# Altium PCB MotorBoard.PcbDoc
Units mil, origin at the board's own origin, x right, y up, seen from the top; angles counter-clockwise.
Board outline 1600 x 1600 mil, 2 copper layers (Top Layer, Bottom Layer), stack 61.811 mil thick; 13 components, 19 nets, 60 pads, 3 vias.
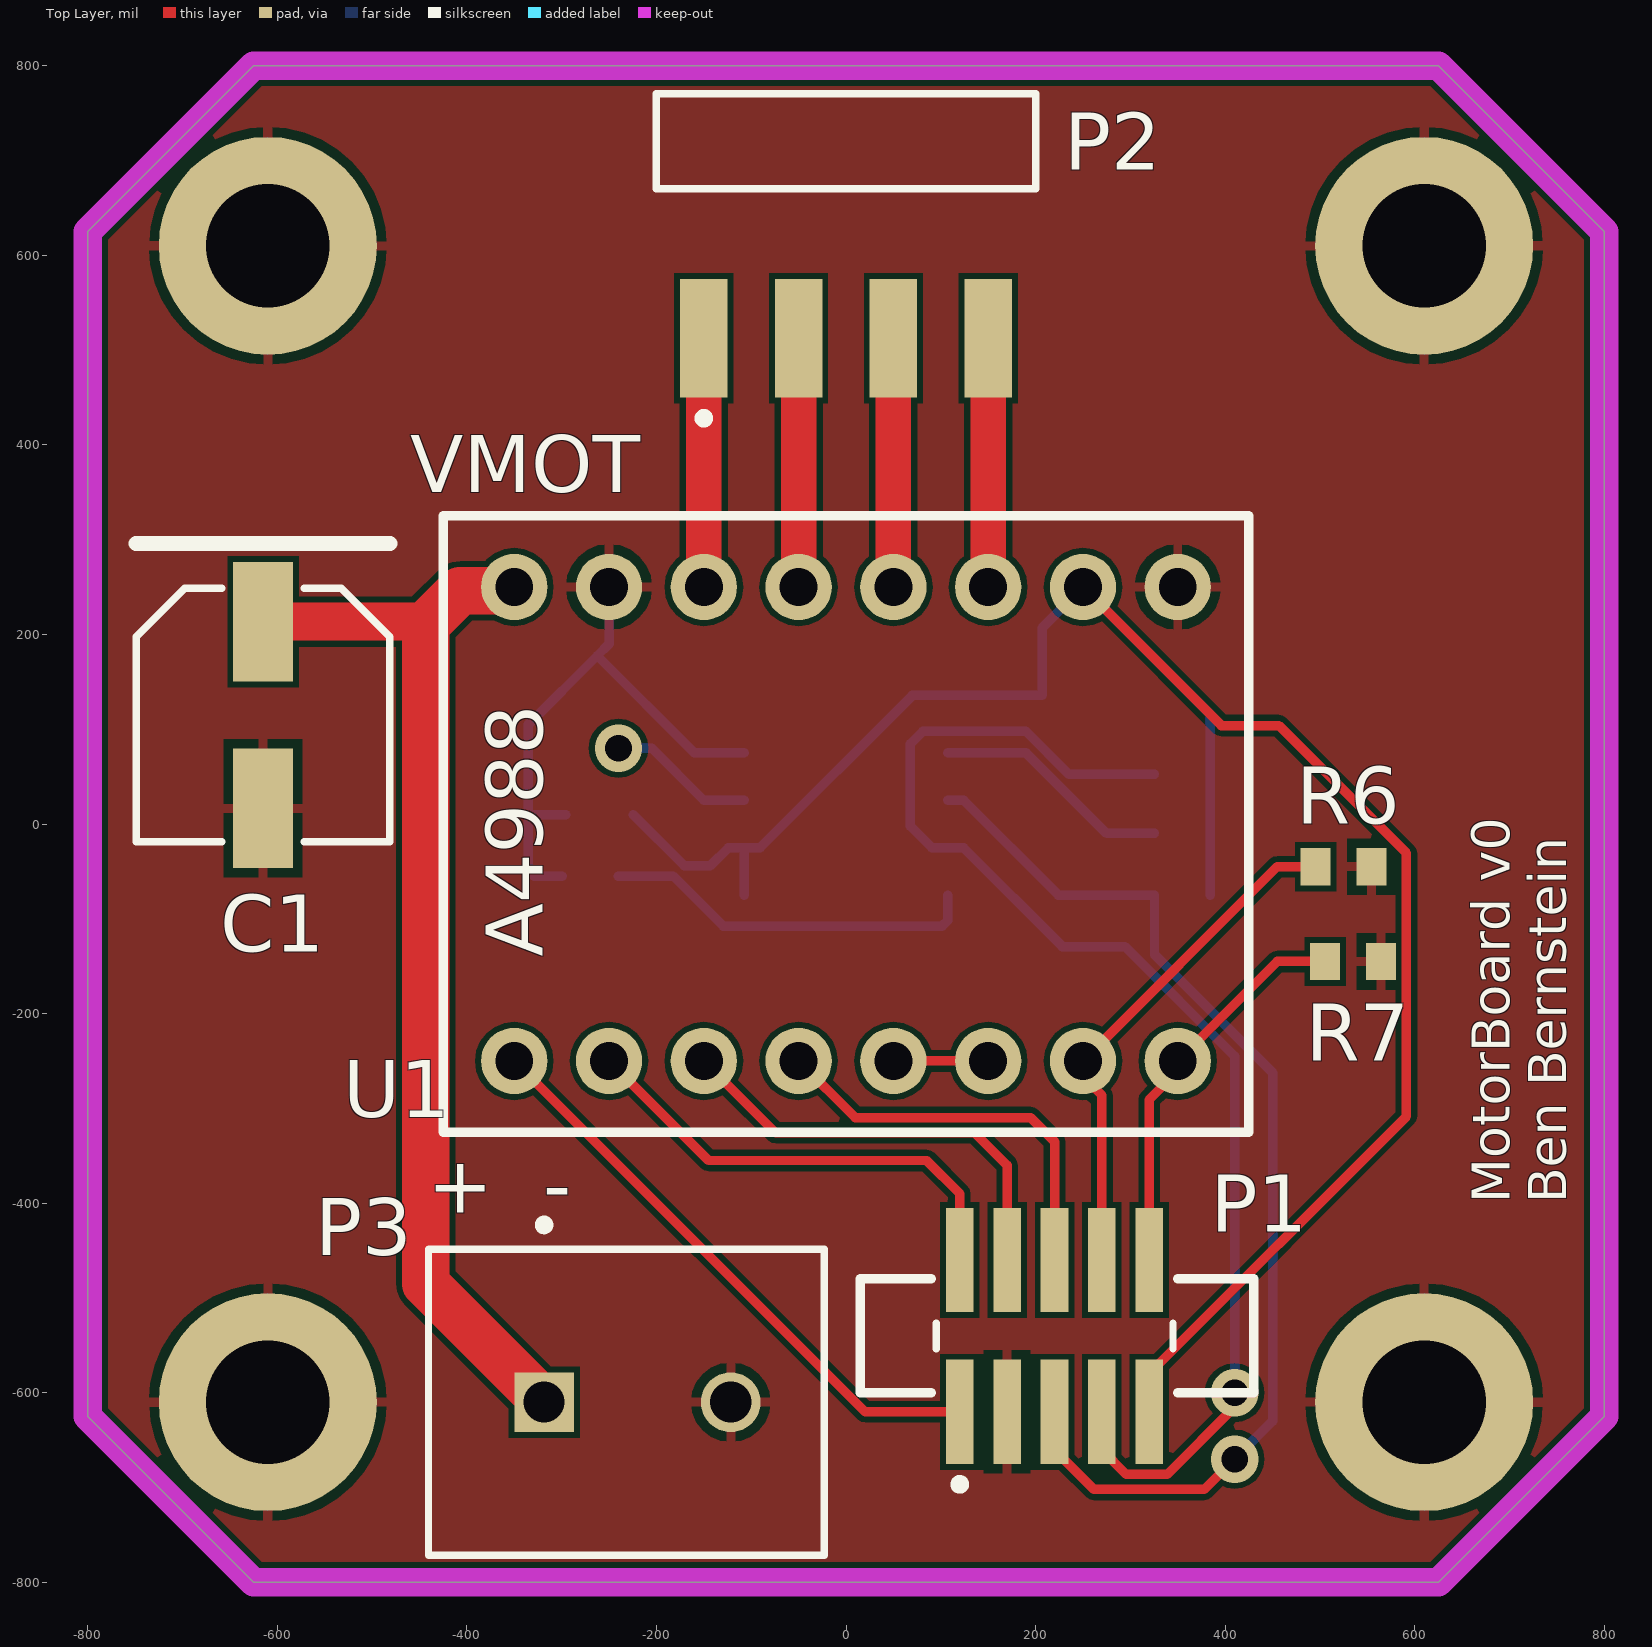
[diagram p0: Top Layer view]
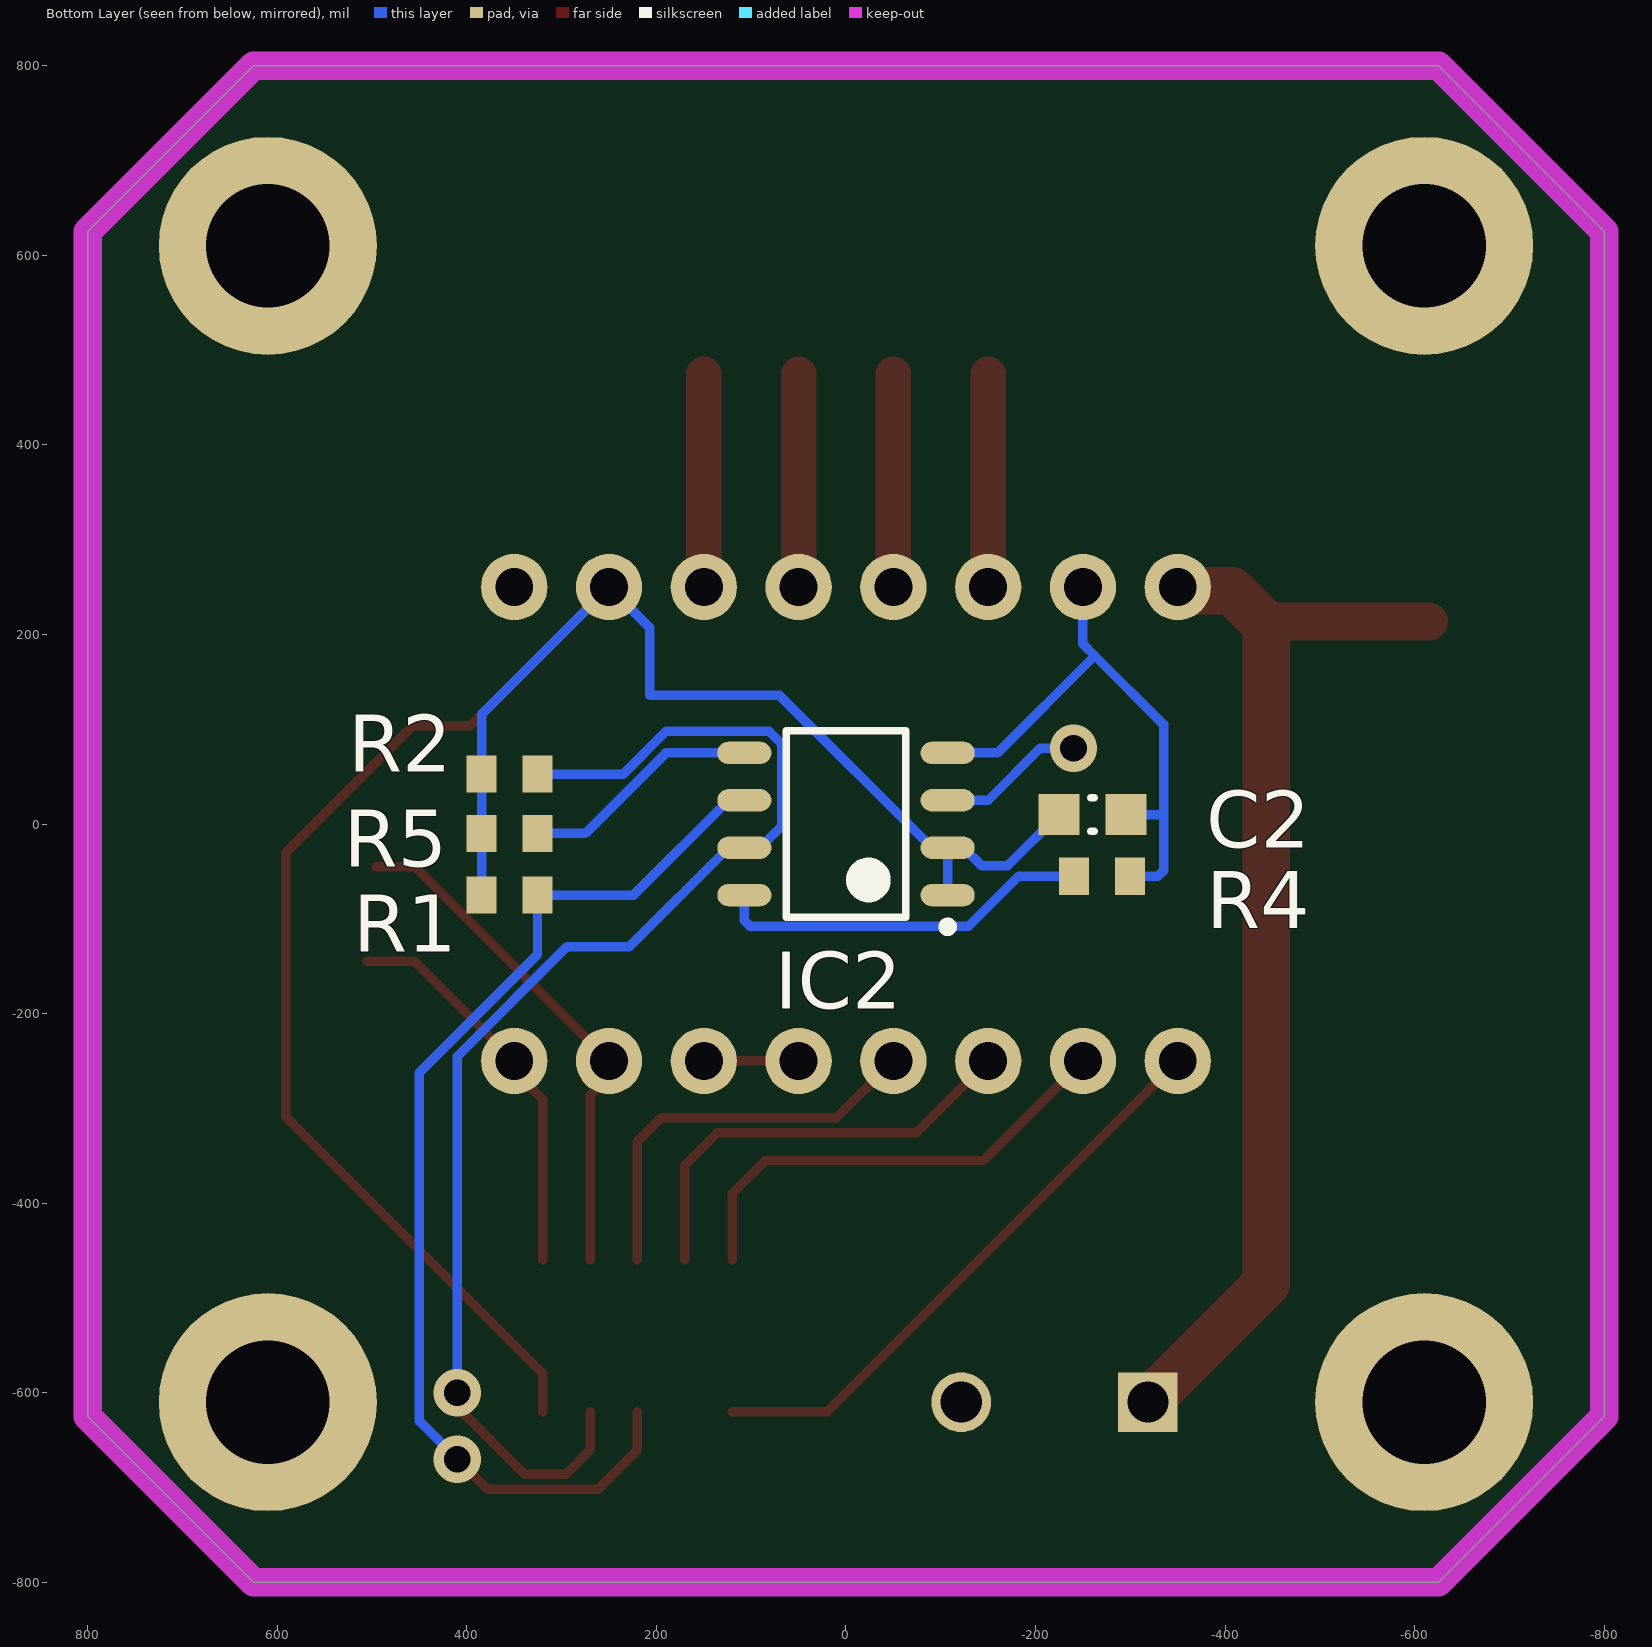
[diagram p1: Bottom Layer view, seen from below]

## Layer stack, top to bottom
Top Solder: solder mask 0.3937, Solder Resist, Dk 3.5
Top Layer: signal copper 1.378
Dielectric 1: dielectric 59.0551, FR-4, Dk 4.8
Bottom Layer: signal copper 1.378
Bottom Solder: solder mask 0.3937, Solder Resist, Dk 3.5

## Board outline
-800,-625 -800,625 -625,800 625,800 800,625 800,-625 625,-800 -625,-800

## Design rules (kind name [scope] priority, off if disabled: settings)
AcuteAngle [All] p1: minimum=6.00000000000000E+0001 checktracksonly=FALSE
AssemblyTestPointUsage [All] p1: allowmultiple=TRUE
AssemblyTestpoint [All] p1: testpointundercomponent=TRUE minsize=30 maxsize=100 preferedsize=60 minholesize=0 maxholesize=40 preferedholesize=32 testpointgrid=1 usegrid=FALSE gridtolerance=0.01 allowsidebottom=TRUE
BoardOutlineClearance [All] p1: gap=10 ignorepadtopadclearanceinfootprint=FALSE except(100: SMDPad-OutlineEdge SMDPad-CavityEdge SMDPad-CutoutEdge THPad-OutlineEdge THPad-CavityEdge THPad-CutoutEdge)
Clearance [All] p1: gap=6 ignorepadtopadclearanceinfootprint=FALSE except(120: SMDPad-THPad)
FabricationTestPointUsage [All] p1: valid=0 allowmultiple=TRUE
FabricationTestpoint [All] p1: side=2 testpointundercomponent=TRUE minsize=30 maxsize=100 preferedsize=60 minholesize=0 maxholesize=40 preferedholesize=32 testpointgrid=1 allowsidebottom=TRUE usegrid=FALSE gridtolerance=0.01
HoleSize [All] p1: absolutevalues=TRUE maxlimit=100 minlimit=8 maxpercent=80.000 minpercent=20.000
MinimumAnnularRing [All] p1: minimumring=6
MinimumSolderMaskSliver [All] p1: minsoldermaskwidth=4
PlaneClearance [All] p1: clearance=10
PolygonConnect [All] p1: connectstyle=Relief reliefconductorwidth=10 reliefentries=4 polygonreliefangle="90 Angle" airgapwidth=10
RoutingVias [All] p1: holewidth=16 width=30 viastyle="Through Hole" minholewidth=8 minwidth=20 maxholewidth=30 maxwidth=50
SMDEntry [All] p1: side=TRUE corner=TRUE anyangle=FALSE
SMDNeckDown [All] p1: percent=75.000
SMDToCorner [All] p1: distance=0
SMDToPlane [All] p1: distance=0
SilkToSilkClearance [All] p1: silktosilkclearance=0
SilkToSolderMaskClearance [IsPad] p1: minsilkscreentomaskgap=0 clearancetoexposedcopper=TRUE
SolderMaskExpansion [All] p1: expansion=4 istentingtop=FALSE
UnRoutedNet [All] p1: checkbadconnections=TRUE
Width [All] p1: maxlimit=1000 minlimit=6 preferedwidth=10
20 further rules are at their usual default settings.

## Components (designator, comment, footprint, x,y, rotation, side; value= is the part's Value field where it differs from the comment)
C1 "EEEFK1E101XP" PNSC-FK-V-D8_V -615,115 r270 top
C2 "CAP 100nF 10V 0603(1608)" CAPC0603(1608)100_M -260,10 r0 bottom value=100nF
IC2 "AS5600-ASOM" SOIC127P600X175-8N 0,0 r0 bottom
P1 "FTSH-105-01-F-DV-K" SMTC-FTSH-105-01-L-DV-K_V 220,-540 r0 top
P2 "TSM-104-01-L-SH" SMTC-TSM-104-01-X-SH 0,725 r0 top
P3 "282836-2" TECO-282836-2_V -220,-610 r0 top
R1 "RC0603FR-07100KL" RESC1608X55X25ML10T15 355,-75 r180 bottom
R2 "RC0603FR-07100KL" RESC1608X55X25ML10T15 355,52.74 r180 bottom
R4 "RC0603FR-07100KL" RESC1608X55X25ML10T15 -270,-55 r0 bottom
R5 "RC0603FR-07100KL" RESC1608X55X25ML10T15 355,-10 r180 bottom
R6 "RC0603FR-07100KL" RESC1608X55X25ML10T15 525,-45 r180 top
R7 "RC0603FR-07100KL" RESC1608X55X25ML10T15 535,-145 r180 top
U1 "A4988 Header" "A4988 Header-Footprint-1" 0,0 r90 top

## Footprints (in the part's own frame and the unit in brackets; to place one, negate y for a bottom-side part, rotate by r counter-clockwise, add the part's x,y. Pads: shape width x height; smd on the part's side, far side on the other; paste and mask are expansions set on the pad)
"A4988 Header-Footprint-1" [mil]
  round 70 hole 40: 1(-250,350) 2(-250,250) 3(-250,150) 4(-250,50) 5(-250,-50) 6(-250,-150) 7(-250,-250) 8(-250,-350) 9(250,-350) 10(250,-250) 11(250,-150) 12(250,-50) 13(250,50) 14(250,150) 15(250,250) 16(250,350)
  silkscreen extent -325,-425 325,425, body extent -300,-405 298,405, height 335
CAPC0603(1608)100_M [mm] "Chip Capacitor, Body 1.6x0.8mm, Height 1.0mm, IPC Low Density"
  rect 1.1x1.1 smd: 1(-0.9,0) 2(0.9,0)
  silkscreen extent -0.05,-0.45 0.05,0.45, body extent -0.87,-0.47 0.88,0.48, height 1
PNSC-FK-V-D8_V [mm] "CAPAE, 2-Leads, Body 6.80x6.80mm"
  rect 3.2x1.6 smd: 1(-2.5,0) 2(2.5,0)
  silkscreen extent -4.6,-3.4 3.4,3.4, body extent -3.9,-3.4 3.9,3.4, height 8
RESC1608X55X25ML10T15 [mm] "Chip Resistor, 2-Leads, Body 1.60x0.80mm, IPC Low Density"
  rect 0.8x1 smd: 1(-0.75,0) 2(0.75,0)
  body extent -0.85,-0.45 0.85,0.45, height 0.55
SMTC-FTSH-105-01-L-DV-K_V [mm] "CONN, 10-Leads, Body 6.35x3.43mm, Pitch 1.27mm"
  rect 0.74x2.79 smd: 1(-2.54,-2.035) 2(-2.54,2.035) 3(-1.27,-2.035) 4(-1.27,2.035) 5(0,-2.035) 6(0,2.035) 7(1.27,-2.035) 8(1.27,2.035) 9(2.54,-2.035) 10(2.54,2.035)
  silkscreen extent -3.17,-4.1 3.17,0.34, body extent -3.17,-2.92 3.18,2.92, height 6.12
SMTC-TSM-104-01-X-SH [mm] "Terminal Strip Single Surface Mount, 1x4 Pins, Horizontal, 2.54mm Pitch, Male"
  rect 1.27x3.18 smd: 1(-3.81,-5.402) 2(-1.27,-5.402) 3(1.27,-5.402) 4(3.81,-5.402)
  silkscreen extent -5.08,-7.67 5.08,1.15, body extent -5.08,-5.96 5.08,6.99, height 3.05
SOIC127P600X175-8N [mm] "SOIC, 8-Leads, Body 4.90x3.90mm, Pitch 1.27mm, IPC Medium Density"
  oval 1.45x0.6 smd: 1(-2.725,1.905) 2(-2.725,0.635) 3(-2.725,-0.635) 4(-2.725,-1.905) 5(2.725,-1.905) 6(2.725,-0.635) 7(2.725,0.635) 8(2.725,1.905)
  silkscreen extent -2.85,-2.5 1.6,2.88, body extent -3,-2.5 3,2.5, height 1.75
TECO-282836-2_V [mm] "Female Header, Pitch 5mm, 1 x 2 Position, Height 10mm"
  rect 1.6x1.6 hole 1.1: 1(-2.5,0)
  round 1.6 hole 1.1: 2(2.5,0)
  silkscreen extent -5.6,-4.1 5,4.87, body extent -5.6,-4.1 5,4.1, height 10

## Part data
C1: library part CMP-2000-06206-1, "Aluminum Electrolytic Capacitor, 100 uF, +/- 20%, 25 V, 2-Pin SMD (Size Code D8), -55 to 105 degC, RoHS, Tape and Reel", Capacitance=100µF, Case Size/Dimension=Ø6.3x7.7mm, Lifetime@Temperature=2000Hrs@105°C, Manufacturer=Panasonic, Operating Temp Range=-55to+105°C, Operating Temp-Max=105°C, Package Description="2-Pin Electrolytic Aluminum Capacitor, Body 6.6 x 6.6 mm", Package Reference=FK-V-D8, Rated Voltage=25V, Ripple Current=280mA, Datasheet URL=http://industrial.panasonic.com/cdbs/www-data/pdf/RDE0000/ABA0000C1181.pdf, Datasheet Version=03/2016, Impedance=0.34O, Manufacturer URL=http://www.panasonic.com/, Mounting Technology=SurfaceMount, Package URL=http://industrial.panasonic.com/cdbs/www-data/pdf/RDE0000/DME0000COL48.pdf, Series=FK, Type=Can
C2: library part CMP-1035-02580-1, "CAP 100nF 10V ±10% 0603 (1608 Metric) Thickness 1mm SMD", Case-EIA=0603, Case-Metric=1608, Rated Voltage="10 V", Tolerance=Â±10%, Max Thickness="1 mm", Technology=SMT
IC2: library part CMP-00894-4, "SENSOR ANGLE 360DEG SMD", Max Operating Temperature=125°C, Min Operating Temperature=-40°C, Lead Free="Lead Free", Mount="Surface Mount", Sensing Method="Hall Effect", Termination=SMD/SMT
P1: library part CMP-2000-05352-1, "Male Header, Pitch 1.27 mm, 2 x 5 Position, Height 6.12 mm, RoHS, Tube", Color=Black, Manufacturer=Samtec, Package Description="Male Header, Pitch 1.27 mm, 2 x 5 Position, Height 5.97 mm, Tail Length 4.32 mm", Package Reference=FTSH-105-01-L-DV-K, Category=Connectors,Interconnects, Connector Type=Header,Shrouded, Contact Finish=Gold, Contact Finish Thickness=3µin(0.08µm), Contact Mating Length="0.120\"(3.05mm)", Contact Type=MalePin, Datasheet URL=http://suddendocs.samtec.com/prints/ftsh-1xx-xx-xxx-dv-xxx-mkt.pdf, Datasheet Version="Rev. ET, 10/1995", Family=RectangularConnectors-Headers,MalePins, Fastening Type=-, Features=-, Manufacturer URL=http://www.samtec.com/, Mounting Type=SurfaceMount, Number of Positions=10, Number of Positions Loaded=All, Number of Rows=2, Package URL=http://suddendocs.samtec.com/prints/ftsh-1xx-xx-xxx-dv-xxx-footprint.pdf, Packaging=Tube, Pitch="0.050\"(1.27mm)", Row Spacing="0.050\"(1.27mm)", Series=FTSH, System=Connector, Termination=Solder
P2: library part CMP-1024-00225-1, "0.025\" SQ Post Header, Surface Mount, Horizontal, -55 to 125 degC, 2.54 mm Pitch, 4-Pin, Male, RoHS", Manufacturer=Samtec, Temperature Range="-55 to 125 degC", ComponentLink1Description="Manufacturer URL", ComponentLink1URL=http://www.samtec.com, ComponentLink2Description=Datasheet, ComponentLink2URL=http://www.samtec.com/documents/webfiles/pdf/TSM.PDF, ComponentLink3Description="Package Specification", ComponentLink3URL=http://www.samtec.com/documents/webfiles/cpdf/TSM-1XX-XX-XXX-SH-XX-XXX-XX-MKT1.pdf, DatasheetVersion=F-214, Mounting Technology="Surface Mount", Orientation=Horizontal, PackageDescription="Terminal Strip Single Surface Mount", PackageReference=TSM-104-01-X-SH, PackageVersion="CD, 7/1991", PartNumber=TSM-104-01-L-SH, Pitch="2.54 mm", RoHS=True
P3: library part CMP-1684-00017-1, "Female Header, Pitch 5 mm, 1 x 2 Position, Height 10 mm, Tail Length 3.5 mm, Rohs, Bulk", Color=Green, Current=13.5A, Manufacturer="TE Connectivity", Package Description="Female Header, Pitch 5 mm, 1 x 2 Position, Height 10 mm, Tail Length 3.5 mm", Package Reference=THD, Standard Package=300, Voltage=300V, 3D Model=282836-2.pdf, Category=Connectors,Interconnects, Clamp Material - Plating=Brass-NickelPlated, Contact Material - Plating=Brass-TinPlated, Datasheet URL=http://www.te.com.cn/commerce/DocumentDelivery/DDEController?Action=showdoc&DocId=Catalog+Section%7F1308389_EUROSTYLE_TERMINAL_BLOCKS%7F0607%7Fpdf%7FEnglish%7FENG_CS_1308389_EUROSTYLE_TERMINAL_BLOCKS_0607.pdf%7F282836-2, Dynamic Catalog=BuchananSeries, Family=TerminalBlocks-WiretoBoard, Featured Product=EurostyleTerminalBlockConnectors, Features=Interlocking(Side), Housing Material=Polyamide(PA66),Nylon6/6, Manufacturer URL=http://www.te.com, Mating Orientation=HorizontalwithBoard, Mounting Type=ThroughHole, Number of Levels=1, Other Names="5ULV-02B / A98076", Packaging=Bulk, Pitch="0.197\"(5.00mm)", Positions Per Level=2, Product Training Modules=Wire-to-BoardEurostyleTerminalBlocks, RoHS Information=282836-2StatementofCompliance, Screw Material - Plating=Brass-NickelPlated, Screw Thread=M3, Series=Buchanan, System=Connector, Torque - Screw=0.68Nm(6Lb-In), Wire Gauge=16-30AWG, Wire Termination=Screw-RisingCageClamp
R1 R2 R4 R5 R6 R7: library part CMP-2100-03662-1, "Chip Resistor, 100 KOhm, +/- 1%, 0.1 W, -55 to 155 degC, 0603 (1608 Metric), RoHS, Tape and Reel", Case Code (Imperial)=0603, Case Code (Metric)=1608, Manufacturer=Yageo, Max Operating Temperature=155degC, Min Operating Temperature=-55degC, Package Description="2-Pin Surface Mount Device, Body 1.6 x 0.8 mm", Power Rating=100mW, Resistance=100KOhm, Temperature Coefficient=100ppm/degreesC, Tolerance=1%, Voltage Rating=50V, Case/Package=0603, Composition=ThickFilm, Datasheet URL=http://www.yageo.com/NewPortal/yageodocoutput?fileName=/pdf/R-Chip/PYu-RC_Group_51_RoHS_L_5.pdf, Datasheet Version="Rev. 5, 10/2016", Depth=0.8mm, Height=0.45mm, Lead Free=LeadFree, Length=1.6mm, Manufacturer URL=http://www.yageo.com/, Military Standard=Not, Number of Pins=2, Package Reference=0603, Packaging=TapeandReel, REACH SVHC=NoSVHC, RoHSCompliant=true, Termination=SMD/SMT, Voltage Rating (DC)=50V, Width=0.8mm
U1: library part CMP-00889-5, "Female Header pins for the A4988 Motor Driver Carrier", Manufacturer_Part_Number=A4988, Component Name="A4988 Headers"

## Free pads (board coordinates)
  round 230 hole 130: 25(-610,-610) 25(-610,610) 25(610,-610) 25(610,610)

## Via types
v1: diameter 50, hole 28, Top Layer to Bottom Layer, 3 vias

## Nets (pads, with @x,y where several pads share a name; then routed paths per layer and width w, separated by ;. In a path a pad name is that pad's centre, name@x,y a point inside that pad or via, vN(x,y) a via of type N, cw(c..) or ccw(c..) an arc to the next point about the centre after c; other vN are vias at no path point)
1A: P2.3 U1.12 | length 224.7
  Top Layer w37.5: U1.12 P2.3@50,474.71
1B: P2.4 U1.11 | length 224.7
  Top Layer w37.5: U1.11 P2.4@150,474.71
2A: P2.2 U1.13 | length 224.7
  Top Layer w37.5: U1.13 P2.2@-50,474.71
2B: P2.1 U1.14 | length 224.7
  Top Layer w37.5: U1.14 P2.1@-150,474.71
3V3: C2.2 IC2.1 IC2.2 P1.9 R1.1 R2.1 R5.1 U1.10 | length 2250.6
  Top Layer w10: U1.10 396.12,103.88 456.64,103.88 591.28,-30.76 591.28,-308.49 320,-579.76 P1.9
  Bottom Layer w10: C2.2 -170.61,-43.96 -142.97,-43.96 -124.02,-25 IC2.2 ; IC2.1 IC2.2 ; R1.1 R5.1 R2.1 384.53,115.47 U1.10 207.26,207.26 207.26,135.69 70.13,135.69 -90.55,-25 IC2.2
-ENABLE: P1.1 U1.1 | length 623.3
  Top Layer w10: U1.1 20.12,-620.12 P1.1
DIR: P1.10 R7.2 U1.8 | length 421.3
  Top Layer w10: P1.10 320,-290.71 350,-260.71 U1.8 455,-145 R7.2
GND: C1.2 C2.1 IC2.4 P1.3 P3.2 pad.25 R4.1 R6.1 R7.1 U1.9 U1.15 | length 609.5
  Bottom Layer w10: R4.1 -329.14,-55 -335,-49.14 -335,10 ; C2.1 -335,10 ; U1.15 -250,190 -262.5,177.5 ; IC2.4 -160,75 -262.5,177.5 ; -335,10 -335,105 -262.5,177.5
MS1: P1.2 U1.2 | length 497.9
  Top Layer w10: U1.2 -145,-355 85,-355 120,-390 P1.2
MS2: P1.4 U1.3 | length 465.4
  Top Layer w10: U1.3 -74.28,-325.72 135.72,-325.72 170,-360 P1.4
MS3: P1.6 U1.4 | length 430.1
  Top Layer w10: U1.4 9.72,-309.72 194.72,-309.72 220,-335 P1.6
NetIC2_5: IC2.5 R5.2 | length 253.4
  Bottom Layer w10: IC2.5 190,75 275,-10 R5.2
NetIC2_8: IC2.8 R4.2 | length 398.8
  Bottom Layer w10: R4.2 -182.19,-55 -129.53,-107.67 101.43,-107.67 107.28,-101.81 IC2.8
NetU1_5: U1.5 U1.6 | length 100
  Top Layer w10: U1.5 U1.6
OUT: IC2.3 | length 155.5
  Bottom Layer w10: v1(-240,80) -205,80 -150,25 IC2.3
SCL: IC2.7 P1.7 R2.2 | length 1401.9
  Top Layer w10: P1.7 270,-660.47 295.57,-686.04 339.12,-686.04 410,-615.16 v1(410,-600)
  Bottom Layer w10: R2.2 234.89,52.74 189.82,97.81 81.1,97.81 67.74,84.45 67.74,-2.19 90.55,-25 124.02,-25 228.29,-129.28 294.33,-129.28 410,-244.95 v1(410,-600)
SDA: IC2.6 P1.5 R1.2 | length 1183.6
  Top Layer w10: P1.5 220,-660.47 261.57,-702.04 377.96,-702.04 v1(410,-670)
  Bottom Layer w10: IC2.6 124.02,25 224.02,-75 R1.2 325.47,-137.79 450,-262.32 450,-630 v1(410,-670)
STEP: P1.8 R6.2 U1.7 | length 548.6
  Top Layer w10: P1.8 270,-286.24 250,-266.24 U1.7 455,-45 R6.2
VMOT: C1.1 P3.1 U1.16 | length 1156.8
  Top Layer w40: C1.1 -439.96,213.43
  Top Layer w50: U1.16 -353.83,246.17 -407.21,246.17 -443.39,210 -443.39,-485.04 P3.1

## Polygon pours and split planes (outlines as drawn)
GND on Top Layer "GND_L01_P000" (solid, pour order 0): -800,-625 -800,625 -625,800 625,800 800,625 800,-625 625,-800 -625,-800

## Keep-outs
Keep-Out Layer:
  the board outline again, w30

## Silkscreen, mask and mechanical layers (free items; w line width, h text height)
Top Overlay:
  lines w10: 90,-600 15,-600 15,-480 90,-480 ; 350,-600 430,-600 430,-480 350,-480
  text "VMOT" at -459.96,350 h60
  text "MotorBoard v0 / Ben Bernstein" at 760,-400 h40 r90
  text "+  -" at -441.25,-410 h60

## Text inside footprints (layer, text, board x,y; h text height)
U1: Top Overlay "A4988" at -320,-140 h60 r90